# EAGLE board Linefollower_STM32 (EAGLE 9.6.2)
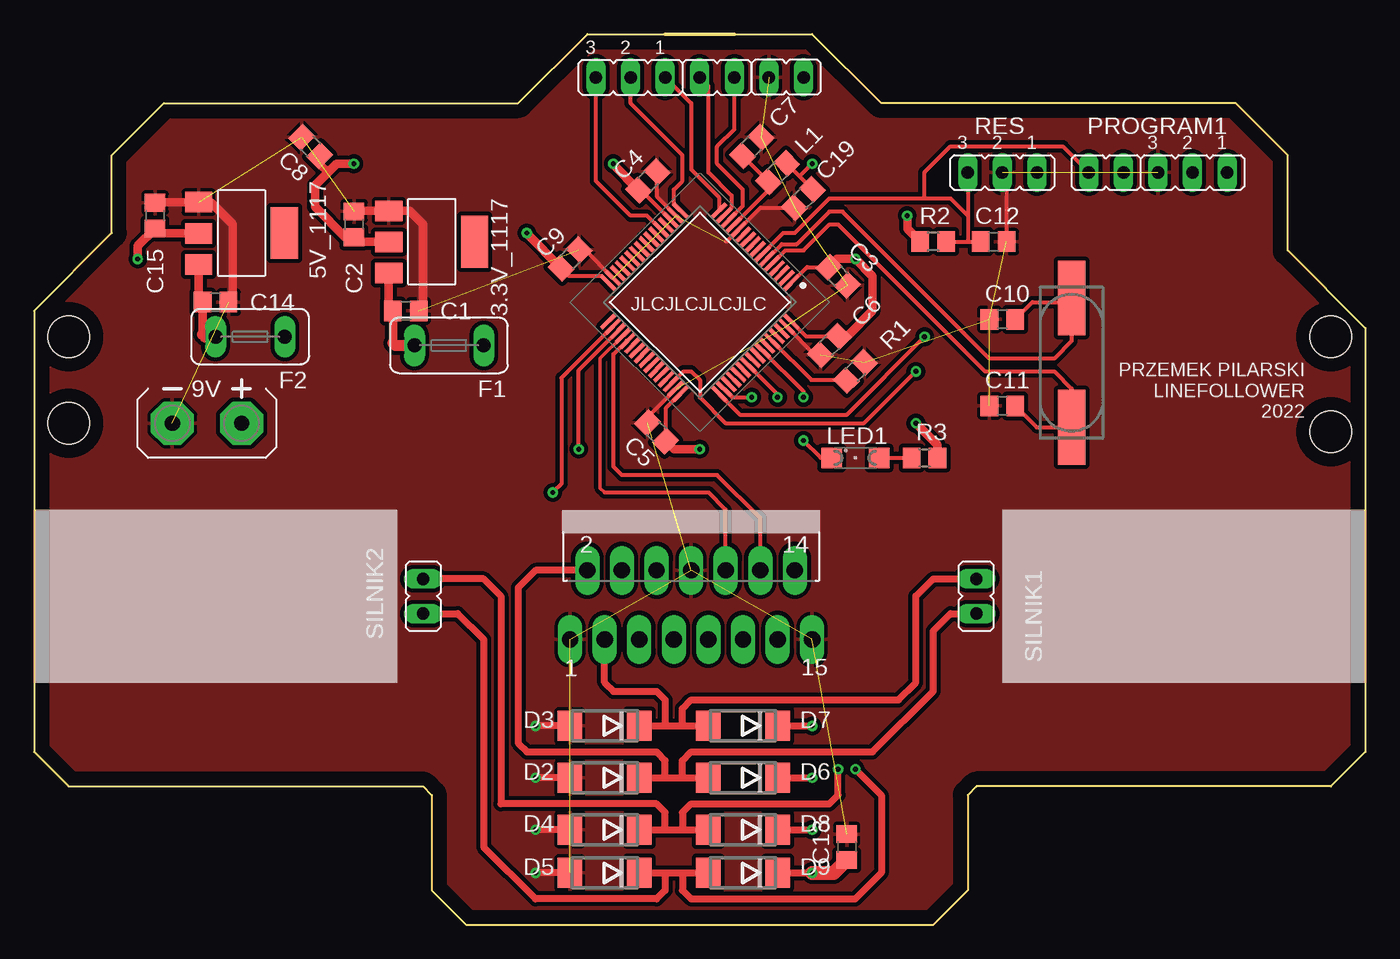
[diagram p0: board, top side]
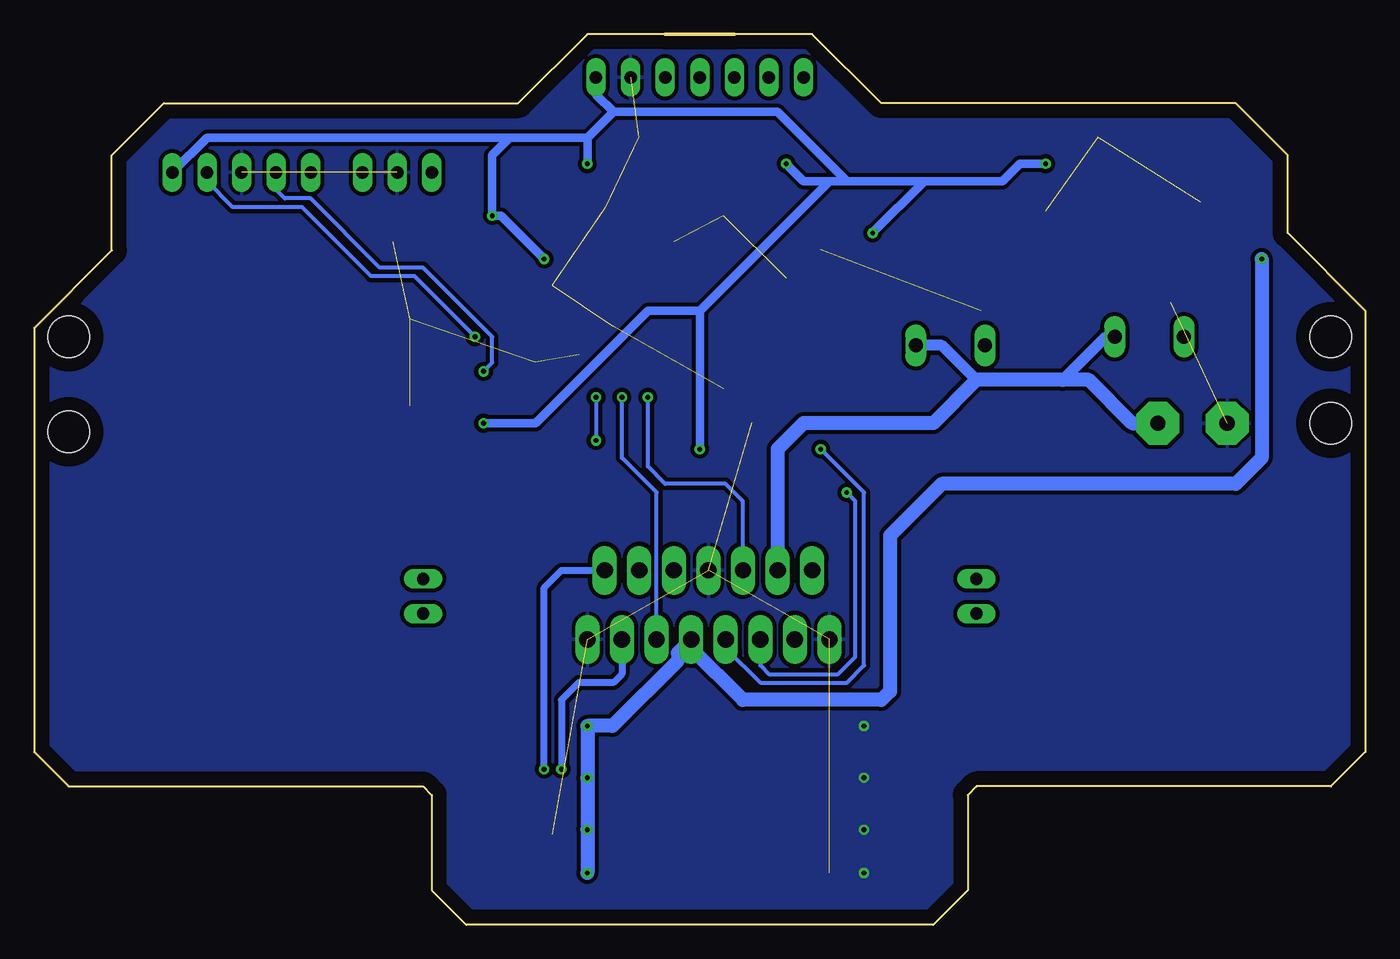
[diagram p1: board, bottom side, seen from below]

Size 97.79 x 65.41 mm. Coordinates in mm from the lower left corner, seen from the top.
Outline: 0,45.09 0,12.7 2.54,10.16 28.57,10.16 29.21,9.53 29.21,2.54 31.75,0 66.04,0 68.58,2.54 68.58,9.53 69.22,10.16 95.25,10.16 97.79,12.7 97.79,43.81 92.08,49.53 92.08,56.52 88.27,60.33 62.23,60.33 57.15,65.41 51.44,65.41 46.35,65.41 40.64,65.41 35.56,60.33 9.53,60.33 5.71,56.52 5.71,50.8 0,45.09
Copper layers (1*16): Top 0.035mm / dielectric 1.5mm / Bottom 0.035mm
Design rules "default": minimum track width 6mil, minimum drill 0.35mm, track to track 6mil, track to pad 6mil, pad to pad 6mil, via to via 6mil, smd to smd 6mil, copper to edge 40mil, drill to drill 6mil, minimum pad ring 10mil, minimum via ring 8mil, stop-mask expansion 4mil, vias tented up to drill 0mil, thermal gap 10mil
Holes 3.05 mm at 2.54,43.18 95.25,43.18 2.54,36.83 95.25,36.2

## Footprints (pad centres in the part's own frame; a part is rotated, then mirrored left to right if it is on the bottom)
SOT223 = smd 1.499 x 2.007: 1 -2.261,-3.15; 2 0.025,-3.15; 3 2.311,-3.15 | smd 3.81 x 2.007: 4 0,3.15
JP1 = drill 0.914 long: 1 0,-1.27; 2 0,1.27
C0805 = smd 1.3 x 1.5: 1 -0.95,0; 2 0.95,0
DO214AA = smd 1.8 x 2.2: A 2.55,0; C -2.55,0
TE5 = drill 1.016 long: 1 -2.54,0; 2 2.54,0
AB9V = drill 1.118 pad 3.15 octagon: + 0,2.54; - 0,-2.54
MULTIWATT-15 = drill 1.2 long: 1 -8.89,-7.62; 2 -7.62,-2.54; 3 -6.35,-7.62; 4 -5.08,-2.54; 5 -3.81,-7.62; 6 -2.54,-2.54; 7 -1.27,-7.62; 8 0,-2.54; 9 1.27,-7.62; 10 2.54,-2.54; 11 3.81,-7.62; 12 5.08,-2.54; 13 6.35,-7.62; 14 7.62,-2.54; 15 8.89,-7.62
QFP50P1200X1200X160-64N = smd 1.475 x 0.3: 1 -5.738,3.75; 2 -5.738,3.25; 3 -5.738,2.75; 4 -5.738,2.25; 5 -5.738,1.75; 6 -5.738,1.25; 7 -5.738,0.75; 8 -5.738,0.25; 9 -5.738,-0.25; 10 -5.738,-0.75; 11 -5.738,-1.25; 12 -5.738,-1.75; 13 -5.738,-2.25; 14 -5.738,-2.75; 15 -5.738,-3.25; 16 -5.738,-3.75; 33 5.738,-3.75; 34 5.738,-3.25; 35 5.738,-2.75; 36 5.738,-2.25; 37 5.738,-1.75; 38 5.738,-1.25; 39 5.738,-0.75; 40 5.738,-0.25; 41 5.738,0.25; 42 5.738,0.75; 43 5.738,1.25; 44 5.738,1.75; 45 5.738,2.25; 46 5.738,2.75; 47 5.738,3.25; 48 5.738,3.75 | smd 0.3 x 1.475: 17 -3.75,-5.738; 18 -3.25,-5.738; 19 -2.75,-5.738; 20 -2.25,-5.738; 21 -1.75,-5.738; 22 -1.25,-5.738; 23 -0.75,-5.738; 24 -0.25,-5.738; 25 0.25,-5.738; 26 0.75,-5.738; 27 1.25,-5.738; 28 1.75,-5.738; 29 2.25,-5.738; 30 2.75,-5.738; 31 3.25,-5.738; 32 3.75,-5.738; 49 3.75,5.738; 50 3.25,5.738; 51 2.75,5.738; 52 2.25,5.738; 53 1.75,5.738; 54 1.25,5.738; 55 0.75,5.738; 56 0.25,5.738; 57 -0.25,5.738; 58 -0.75,5.738; 59 -1.25,5.738; 60 -1.75,5.738; 61 -2.25,5.738; 62 -2.75,5.738; 63 -3.25,5.738; 64 -3.75,5.738
SML1206 = smd 1.5 x 1.5: A 1.75,0; C -1.75,0
JP2 = drill 0.914 long: 1 -2.54,0; 2 0,0; 3 2.54,0
CSM-7X-DU = smd 5.5 x 2: 1 -4.75,0; 2 4.75,0
R0805 = smd 1.3 x 1.5: 1 -0.95,0; 2 0.95,0

## Placement (x,y rotation side)
3.3V_1117  REG1117  [SOT223]  29.21,50.16 270 top
5V_1117  REG1117  [SOT223]  15.24,50.8 270 top
33GNDM  [JP1]  55.24,62.23 270 top
C1  10u  [C0805]  27.3,45.09 0 top
C2  10u  [C0805]  23.5,51.44 90 top
C3  100n  [C0805]  59.05,47.62 315 top
C4  100n  [C0805]  45.09,54.61 45 top
C5  100n  [C0805]  45.72,36.2 135 top
C6  100n  [C0805]  58.42,42.55 225 top
C7  1u  [C0805]  52.7,57.15 45 top
C8  4u7  [C0805]  20.32,57.15 135 top
C9  100n  [C0805]  39.37,48.9 45 top
C10  20p  [C0805]  71.12,44.45 0 top
C11  20p  [C0805]  71.12,38.1 0 top
C12  [C0805]  70.48,50.16 180 top
C13  100n  [C0805]  59.69,5.71 90 top
C14  10u  [C0805]  13.34,45.72 0 top
C15  10u  [C0805]  8.89,52.07 90 top
C19  100n  [C0805]  56.52,53.34 225 top
D2  [DO214AA]  41.91,10.79 180 top
D3  [DO214AA]  41.91,14.61 180 top
D4  [DO214AA]  41.91,6.99 180 top
D5  [DO214AA]  41.91,3.81 180 top
D6  [DO214AA]  52.07,10.79 180 top
D7  [DO214AA]  52.07,14.61 180 top
D8  [DO214AA]  52.07,6.99 180 top
D9  [DO214AA]  52.07,3.81 180 top
F1  [TE5]  30.48,42.55 180 top
F2  [TE5]  15.88,43.18 180 top
G1  AB9V  [AB9V]  12.7,36.83 270 top
IC2  L298  [MULTIWATT-15]  48.26,28.57 0 top
IC4  STM32F101RET6  [QFP50P1200X1200X160-64N]  48.9,45.72 225 top
L1  27n  [C0805]  54.61,55.24 45 top
LED1  [SML1206]  60.33,34.29 0 top
PROGRAM1  [JP1]  78.74,55.24 90 top
PROGRAM2  [JP2]  85.09,55.24 180 top
Q1  CSM-7X-DU  [CSM-7X-DU]  76.2,41.27 270 top
R1  100k  [R0805]  60.33,40.64 225 top
R2  10k  [R0805]  66.04,50.16 180 top
R3  100  [R0805]  65.41,34.29 0 top
RES  [JP2]  71.12,55.24 180 top
S1S2S3M  [JP2]  43.81,62.23 180 top
S4S5M  [JP1]  50.16,62.23 90 top
SILNIK1  [JP1]  69.22,24.13 180 top
SILNIK2  [JP1]  28.57,24.13 0 top

## Library data of the parts
3.3V_1117 5V_1117 = burr-brown; MPN: REG1117; OC_FARNELL: 1097566; OC_NEWARK: 14P6981
33GNDM PROGRAM1 PROGRAM2 RES S1S2S3M S4S5M SILNIK1 SILNIK2 = jumper
C1-C15 C19 L1 = rcl; SPICEPREFIX: C
D2-D9 = diode
F1 F2 = fuse; OC_FARNELL: unknown; OC_NEWARK: unknown
G1 = battery
IC2 = st-microelectronics; MPN: L298N; OC_FARNELL: 1589425; OC_NEWARK: 32M1527
IC4 = STM32F101RET6; ARROW_PART_NUMBER: STM32F101RET6; ARROW_PRICE-STOCK: https://www.arrow.com/en/products/stm32f101ret6/stmicroelectronics; DESCRIPTION: STM32F101RET6, 32 bit ARM Cortex M3 Microcontroller 36MHz 512kb Flash, 48kb RAM, I2C SPI 64-Pin LQFP; HEIGHT: 1.6mm; MANUFACTURER_NAME: STMicroelectronics; MANUFACTURER_PART_NUMBER: STM32F101RET6; MOUSER_PART_NUMBER: 511-STM32F101RET6; MOUSER_PRICE-STOCK: https://www.mouser.co.uk/ProductDetail/STMicroelectronics/STM32F101RET6?qs=tZXS5FmuAdk0z%2Fo1gi8heg%3D%3D
LED1 = led
Q1 = crystal; OC_FARNELL: unknown; OC_NEWARK: unknown
R1-R3 = rcl; SPICEPREFIX: R

## Nets
3.3V: 3.3V_1117.2 33GNDM.2 C2.1 C3.1 C4.1 C5.1 C6.1 C8.1 C9.1 C19.1 IC4.1 IC4.19 IC4.32 IC4.48 IC4.64 L1.2 PROGRAM2.1 R2.2 R3.2
5V: 5V_1117.2 C13.1 C15.1 D6.C D7.C D8.C D9.C IC2.9
9V: F1.1 F2.1 G1.+ IC2.4
GND: 3.3V_1117.1 5V_1117.1 33GNDM.1 C1.2 C2.2 C3.2 C4.2 C5.2 C6.2 C7.2 C8.2 C9.2 C10.1 C11.1 C12.1 C13.2 C14.2 C15.2 C19.2 D2.A D3.A D4.A D5.A G1.- IC2.1 IC2.8 IC2.15 IC4.12 IC4.18 IC4.31 IC4.47 IC4.63 PROGRAM2.3 R1.1 RES.2
IN1: IC2.5 IC4.34
IN2: IC2.7 IC4.35
IN3: IC2.10 IC4.36
IN4: IC2.12 IC4.37
N$1: C10.2 IC4.6 Q1.1
N$2: C7.1 IC4.13 L1.1
N$3: 3.3V_1117.3 C1.1 F1.2
N$4: C11.2 IC4.5 Q1.2
N$5: IC4.60 R1.2
N$6: IC4.58 LED1.C
N$7: LED1.A R3.1
N$17: D2.C D6.A IC2.2 SILNIK1.2
N$18: D3.C D7.A IC2.3 SILNIK1.1
N$19: D4.C D8.A IC2.13 SILNIK2.2
N$20: D5.C D9.A IC2.14 SILNIK2.1
N$25: 5V_1117.3 C14.1 F2.2
NRST: C12.2 IC4.7 PROGRAM1.2 R2.1 RES.3
S2: IC4.17 S1S2S3M.2
S3: IC4.16 S1S2S3M.1
S4: IC4.15 S4S5M.2
S$7: IC4.21 S1S2S3M.3
S$11: IC4.14 S4S5M.1
SW_CLK: IC4.49 PROGRAM2.2
SW_DIO: IC4.46 PROGRAM1.1
TIM10_CH1: IC2.6 IC4.50
TIM11_CH1: IC2.11 IC4.55

## Tracks (layer width: path | path; a pad name or v marks a point on that pad's centre or on a via)
3.3V  (via drill 0.35)
  Top 0.305: IC4.1 56.77,48.3 C3.1 | IC4.19 44.57,53.94 C4.1 | IC4.32 41.69,47.62 39.3,47.62 C9.1 | IC4.48 46.39,37.91 C5.1 | IC4.64 56.7,43.22 C6.1 | C19.1 56.23,54.96 | 56.23,54.96 L1.2 | v57.15,55.88 56.23,54.96
  Top 0.61: 3.3V_1117.2 23.84,50.14 C2.1 22.86,50.48 20.64,52.71 20.64,54.29 21.59,55.24 | v23.5,55.88 22.23,55.88 21.59,55.24 | C9.1 36.2,50.73 v36.2,50.8 | C4.1 42.55,55.81 v42.55,55.88 | v64.14,52.07 64.14,51.12 R2.2 | C3.1 58.98,48.9 v60.33,48.9 61.59,47.62 61.59,45.09 59.73,43.22 C6.1 | C5.1 | C5.1 46.99,34.92 v48.9,34.92 | v64.77,36.83 66.36,35.24 R3.2 | C8.1 20.99,55.84 21.59,55.24
  Bottom 0.61: 32.38,54.61 26.67,54.61 25.4,55.88 v23.5,55.88 | v36.2,50.8 32.38,54.61 | v42.55,55.88 41.27,54.61 39.37,54.61 | 32.38,54.61 38.1,54.61 | 38.1,54.61 39.37,54.61 | 38.1,54.61 43.18,59.69 55.24,59.69 | 55.24,59.69 56.52,60.96 33GNDM.2 | 55.24,59.69 57.15,57.78 | 57.15,57.78 v57.15,55.88 | 57.15,57.78 62.87,57.78 | 62.87,57.78 85.09,57.78 PROGRAM2.1 | 62.87,57.78 64.14,56.52 v64.14,52.07 63.5,52.07 v60.33,48.9 | 39.37,54.61 48.9,45.09 | v48.9,34.92 48.9,45.09 | 48.9,45.09 52.7,45.09 60.96,36.83 v64.77,36.83
5V  (via drill 0.35)
  Top 0.508: D7.C v57.15,14.61 | D6.C v57.15,10.79 | D8.C v57.15,6.99 | D9.C v57.15,3.81
  Top 0.61: 5V_1117.2 9.23,50.77 C15.1 7.62,49.85 v7.62,48.9
  Top 1.016: C13.1 58.73,3.81 v57.15,3.81
  Bottom 1.016: v7.62,48.9 7.62,34.29 9.53,32.38 31.11,32.38 34.92,28.57 34.92,17.14 35.56,16.51 45.72,16.51 49.53,20.32 IC2.9 50.51,19.98 50.51,19.41 55.31,14.61 v57.15,14.61 v57.15,10.79 v57.15,6.99 v57.15,3.81
9V
  Bottom 0.813: F2.1 19.05,43.18 22.23,40.01 | 28.57,40.01 31.11,42.55 F1.1
  Bottom 1.016: G1.+ 17.14,36.83 20.32,40.01 22.23,40.01 28.57,40.01 31.75,36.83 41.27,36.83 43.18,34.92 IC2.4
GND  (via drill 0.35)  (24 unrouted)
  Top 0.305: IC4.18 45.76,53.45 C4.2 | IC4.31 40.45,49.57 C9.2 | IC4.47 45.05,37.28 C5.2 | IC4.63 57.34,41.87 C6.2 | C19.2 53.37,52.67 IC4.12 50.87,50.16 50.8,50.16 | RES.2 71.44,54.93 C12.1
  Top 0.508: D3.A v36.83,14.61 | D2.A v36.83,10.79 | D4.A v36.83,6.99 | D5.A v36.83,3.81
  Top 0.61: C2.2 23.54,52.43 3.3V_1117.1 27.58,52.43 28.57,51.44 28.57,45.41 C1.2 | C15.2 8.93,53.06 5V_1117.1 12.98,53.06 14.61,51.44 14.61,46.04 C14.2
  pour Top (isolate 0.305): -2.54,103.5 -2.54,-5.71 115.57,-5.71 115.57,103.5
  pour Bottom (isolate 0.305): -5.71,104.78 -5.71,-8.89 107.95,-8.89 107.95,104.78
IN1  (via drill 0.35)
  Top 0.305: IC4.34 38.73,40.16 38.73,32.38 v38.1,31.75
  Bottom 0.305: IC2.5 44.45,19.05 43.81,18.41 38.73,18.41 37.47,19.68 37.47,31.11 v38.1,31.75
IN2  (via drill 0.35)
  Top 0.305: IC4.35 40.01,40.72 v40.01,34.92
  Bottom 0.305: IC2.7 46.99,20.32 44.45,17.78 38.1,17.78 36.83,19.05 36.83,31.75 v40.01,34.92
IN3
  Top 0.254: 41.91,31.75 41.59,32.07 41.59,41.6 IC4.36
  Top 0.305: IC2.10 50.8,30.48 49.53,31.75 41.91,31.75
IN4
  Top 0.305: IC2.12 53.34,29.84 50.16,33.02 43.18,33.02 42.55,33.65 42.55,41.91 43.54,42.9 IC4.37
N$1
  Top 0.305: IC4.6 54.93,49.99 56.02,49.99 58.41,52.38 59.38,52.38 70.18,41.58 74.93,41.58 76.2,42.85 76.2,45.72 | Q1.1 76.2,45.72 | C10.2 73.34,45.72 76.2,45.72
N$2
  Top 0.305: IC4.13 53.94,53.95 L1.1 C7.1
N$3
  Top 0.61: 3.3V_1117.3 26.06,45.38 C1.1 26.36,42.72
  Top 0.813: 26.36,42.72 26.52,42.55 F1.2
N$4
  Top 0.305: IC4.5 55.18,49.53 56.53,49.53 58.43,51.44 59.05,51.44 69.85,40.64 74.93,40.64 76.2,39.37 Q1.2 73.64,36.52 C11.2
N$5
  Top 0.305: IC4.60 57.09,40.01 59.62,40.01 R1.2
N$6  (via drill 0.35)
  Top 0.305: IC4.58 56.52,39.16 v56.52,38.73 | LED1.C 57.78,34.29 v56.52,35.56
  Bottom 0.305: v56.52,38.73 v56.52,35.56
N$7
  Top 0.305: LED1.A R3.1
N$17
  Top 0.508: D2.C 46.35,10.79 | 46.35,10.79 47.62,10.79 | 47.62,10.79 D6.A | 47.62,10.79 47.62,12.06 48.26,12.7 61.59,12.7 66.04,17.14 66.04,21.59 67.31,22.86 SILNIK1.2 | 46.35,10.79 46.35,12.06 45.72,12.7 36.2,12.7 35.56,13.34 35.56,24.77 36.83,26.04 IC2.2
N$18
  Top 0.508: D3.C 46.35,14.61 | 46.35,14.61 47.62,14.61 | 47.62,14.61 D7.A | IC2.3 41.91,17.78 42.55,17.14 45.72,17.14 46.35,16.51 46.35,14.61 | 47.62,14.61 47.62,15.88 48.26,16.51 63.5,16.51 64.77,17.78 64.77,24.13 66.04,25.4 SILNIK1.1
N$19  (via drill 0.35)
  Top 0.508: D4.C 46.35,6.99 | 46.35,6.99 47.62,6.99 | 47.62,6.99 47.62,8.26 48.26,8.89 58.42,8.89 59.05,9.53 v59.05,11.43 | 46.35,6.99 46.35,8.26 45.72,8.89 34.29,8.89 34.29,24.13 33.02,25.4 SILNIK2.2 | 47.62,6.99 D8.A
  Bottom 0.508: IC2.13 54.61,18.41 55.24,17.78 57.78,17.78 59.05,16.51 v59.05,11.43
N$20  (via drill 0.35)
  Top 0.508: D5.C 46.35,3.81 | 46.35,3.81 47.62,3.81 | 47.62,3.81 D9.A | 46.35,3.81 46.35,2.54 45.72,1.91 36.83,1.91 33.02,5.71 33.02,20.95 31.11,22.86 SILNIK2.1 | 47.62,3.81 47.62,2.54 48.26,1.91 60.33,1.91 62.23,3.81 62.23,9.53 v60.33,11.43
  Bottom 0.508: v60.33,11.43 60.33,24.77 59.05,26.04 IC2.14
N$25
  Top 0.61: 5V_1117.3 12.09,46.02 C14.1 12.38,43.35
  Top 0.813: 12.38,43.35 12.55,43.18 F2.2
NRST
  Top 0.305: R2.1 68.58,50.16 | 68.58,50.16 C12.2 | RES.3 68.58,52.07 | 68.58,52.07 68.58,50.16 | IC4.7 55.04,50.8 55.88,50.8 58.42,53.34 65.41,53.34 | 65.41,53.34 67.31,53.34 68.58,52.07 | 65.41,53.34 65.41,55.24 67.31,57.15 75.56,57.15 PROGRAM1.2
S2
  Top 0.305: IC4.17 46.99,52.93 46.99,53.98 47.62,54.61 47.62,56.52 43.81,60.33 S1S2S3M.2
S3
  Top 0.305: IC4.16 50.3,53.43 48.26,55.47 48.26,60.33 S1S2S3M.1
S4
  Top 0.305: S4S5M.2 49.53,61.59 49.53,55.24 51.23,53.54 51.23,52.65 IC4.15
S$7
  Top 0.305: IC4.21 45.02,52.07 43.81,52.07 41.27,54.61 S1S2S3M.3
S$11
  Top 0.305: S4S5M.1 51.44,58.42 50.16,57.15 50.16,55.88 52.07,53.98 52.07,52.78 IC4.14
SW_CLK  (via drill 0.35)
  Top 0.305: IC4.49 51.85,37.47 59.69,37.47 v65.41,43.18
  Bottom 0.305: v65.41,43.18 69.85,47.62 73.03,47.62 78.11,52.7 83.19,52.7 85.09,54.61 PROGRAM2.2
SW_DIO  (via drill 0.35)
  Top 0.305: IC4.46 47.7,40.64 48.26,40.64 48.9,40.01 48.9,38.73 50.8,36.83 60.96,36.83 v64.77,40.64
  Bottom 0.305: v64.77,40.64 64.14,41.27 64.14,43.18 69.22,48.26 72.39,48.26 77.47,53.34 79.38,53.34 80.01,53.98 PROGRAM1.1
TIM10_CH1  (via drill 0.35)
  Top 0.305: IC4.50 51.28,38.73 v52.7,38.73
  Bottom 0.305: IC2.6 45.72,31.11 46.99,32.38 51.44,32.38 52.7,33.66 v52.7,38.73
TIM11_CH1  (via drill 0.35)
  Top 0.305: IC4.55 54.61,38.94 v54.61,38.73
  Bottom 0.305: IC2.11 52.07,31.75 54.61,34.29 v54.61,38.73
(copper drawn outside any net)
  shapes: Top area x2

## Text on the board
tNames: JLCJLCJLCJLC | PRZEMEK PILARSKI / LINEFOLLOWER / 2022